# EAGLE board Proppeler Clock Print (EAGLE 9.5.0)
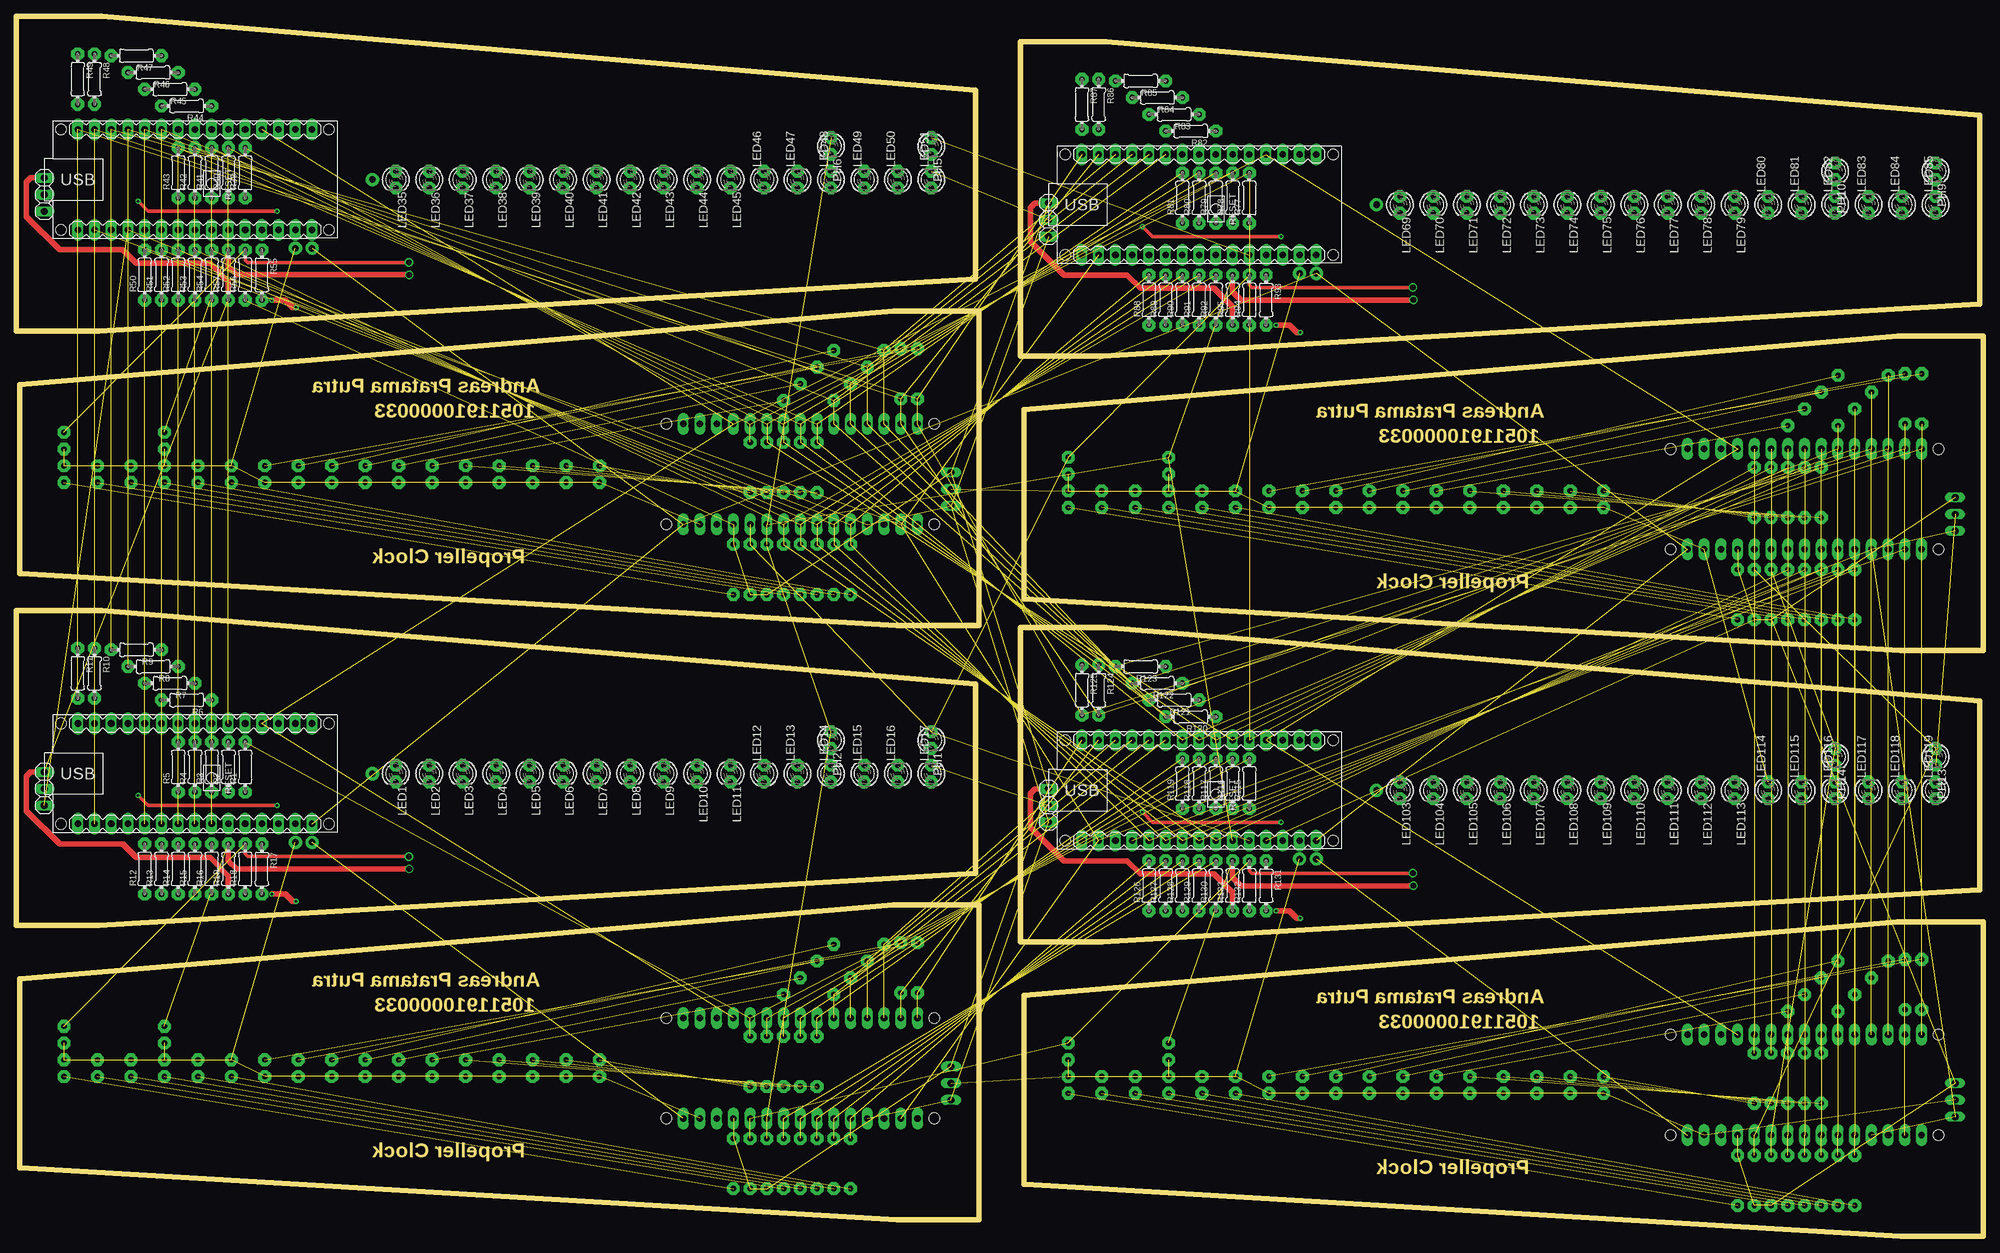
[diagram p0: board, top side]
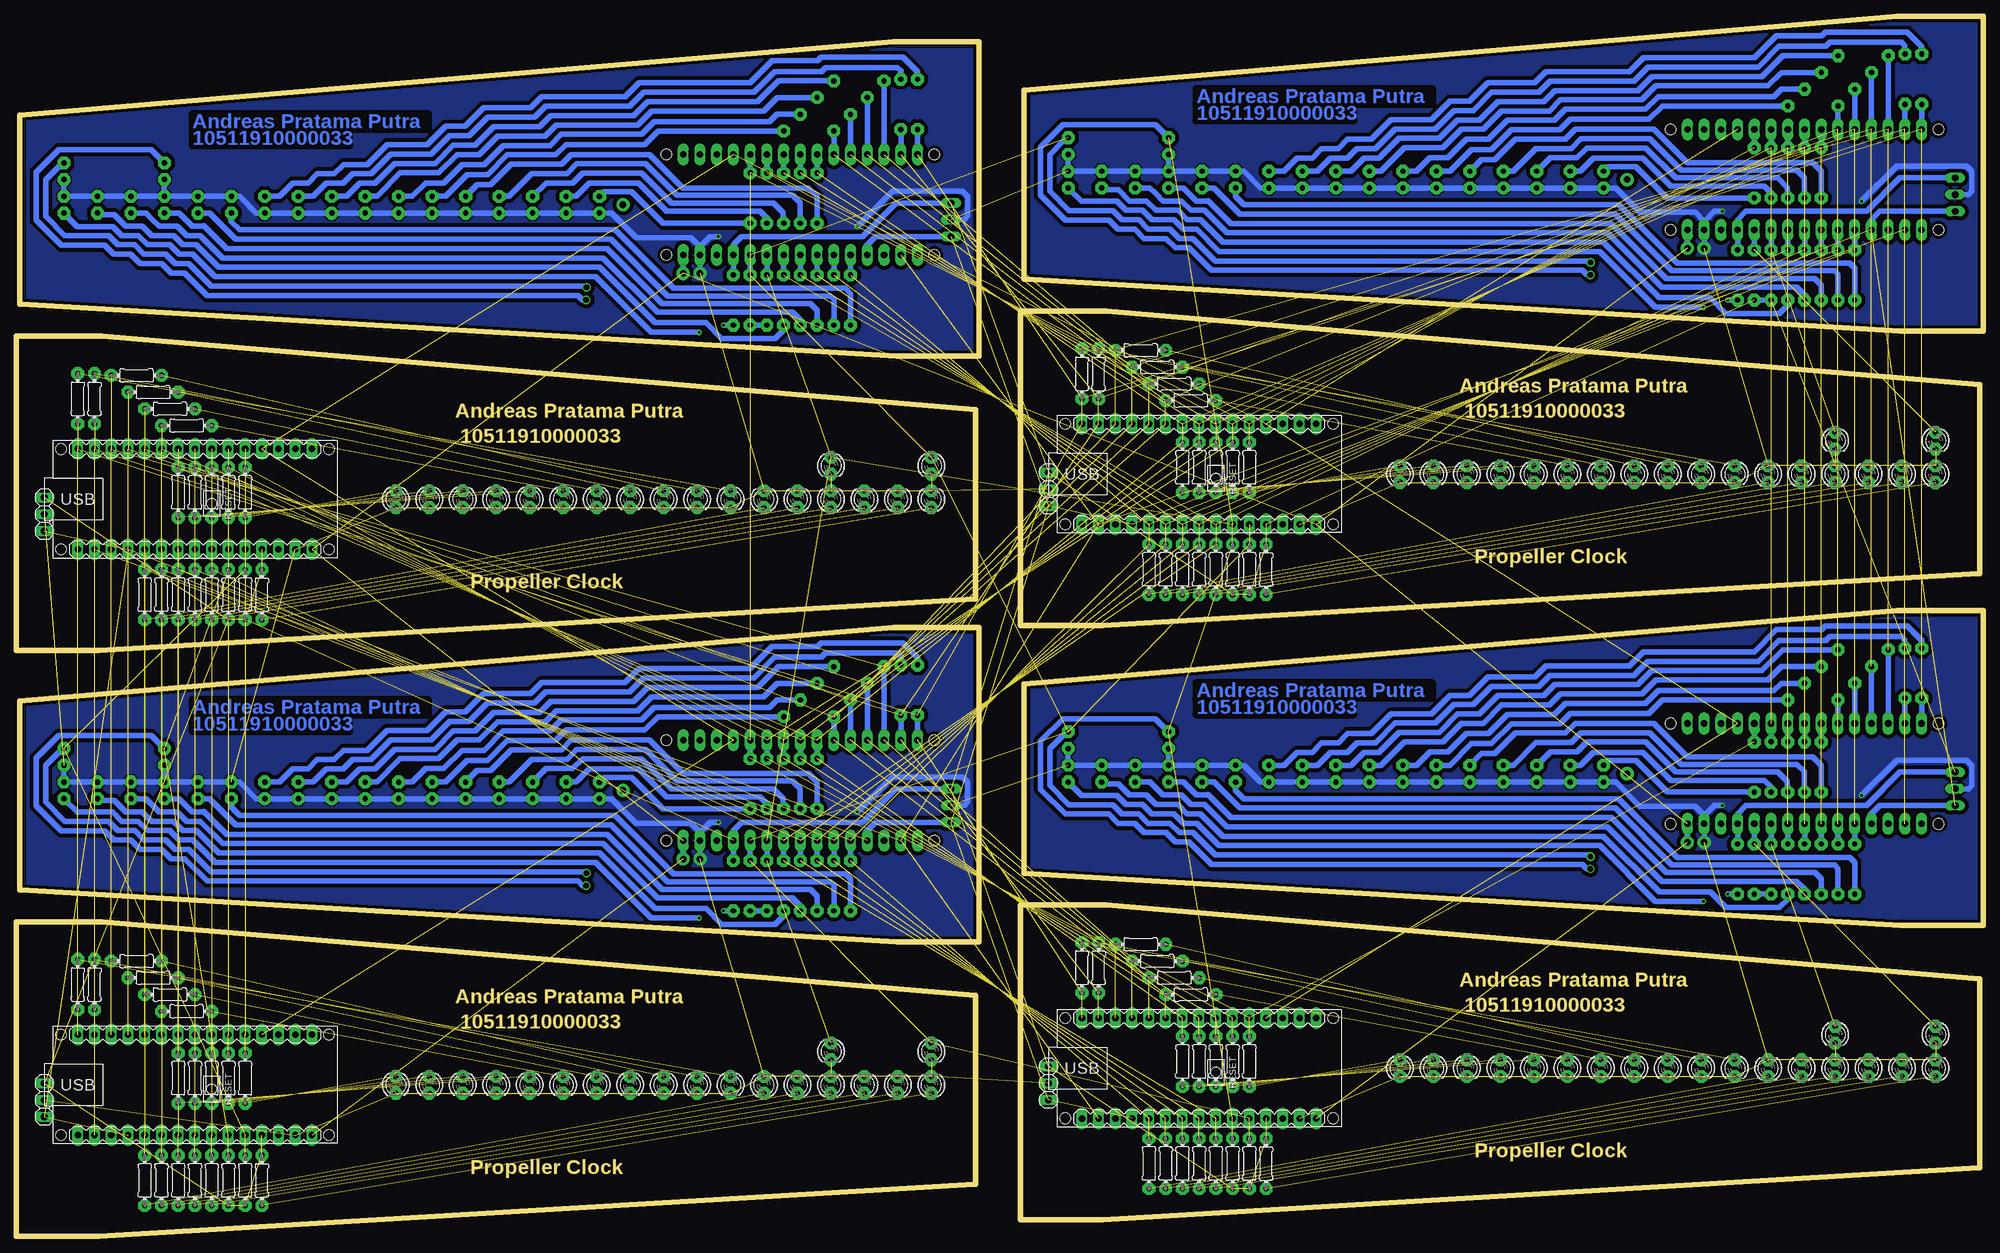
[diagram p1: board, bottom side, seen from below]

Size 298.45 x 185.17 mm. Coordinates in mm from the lower left corner, seen from the top.
Outline: 145.41,55.12 12.45,47.24 0,47.24 0,95 12.95,95 145.54,83.82
Outline: 145.54,55.12 145.54,83.82
Outline: 145.54,83.82 145.29,83.82
Outline: 0.64,10.41 133.6,2.54 146.05,2.54 146.05,50.29 133.1,50.29 0.51,39.12
Outline: 0.51,10.41 0.51,39.12
Outline: 0.51,39.12 0.76,39.12
Outline: 145.41,145.29 12.45,137.41 0,137.41 0,185.17 12.95,185.17 145.54,173.99
Outline: 145.54,145.29 145.54,173.99
Outline: 145.54,173.99 145.29,173.99
Outline: 0.64,100.58 133.6,92.71 146.05,92.71 146.05,140.46 133.1,140.46 0.51,129.29
Outline: 0.51,100.58 0.51,129.29
Outline: 0.51,129.29 0.76,129.29
Outline: 297.81,141.48 164.85,133.6 152.4,133.6 152.4,181.36 165.35,181.36 297.94,170.18
Outline: 297.94,141.48 297.94,170.18
Outline: 297.94,170.18 297.69,170.18
Outline: 153.03,96.77 286,88.9 298.45,88.9 298.45,136.65 285.5,136.65 152.91,125.48
Outline: 152.91,96.77 152.91,125.48
Outline: 152.91,125.48 153.16,125.48
Outline: 297.81,52.58 164.85,44.7 152.4,44.7 152.4,92.46 165.35,92.46 297.94,81.28
Outline: 297.94,52.58 297.94,81.28
Outline: 297.94,81.28 297.69,81.28
Outline: 153.03,7.87 286,0 298.45,0 298.45,47.75 285.5,47.75 152.91,36.58
Outline: 152.91,7.87 152.91,36.58
Outline: 152.91,36.58 153.16,36.58
Copper layers (1*16): Top 0.035mm / dielectric 1.5mm / Bottom 0.035mm
Design rules "default *": minimum track width 6mil, minimum drill 0.35mm, track to track 24mil, track to pad 24mil, pad to pad 24mil, via to via 24mil, smd to smd 24mil, copper to edge 20mil, drill to drill 6mil, minimum pad ring 10mil, minimum via ring 8mil, stop-mask expansion 4mil, vias tented up to drill 0mil, thermal gap 10mil

## Footprints (pad centres in the part's own frame; a part is rotated, then mirrored left to right if it is on the bottom)
1X03 = drill 1.016 long: 1 -2.54,0; 2 0,0; 3 2.54,0
LED3MM = drill 0.813 pad 1.93 octagon: A -1.27,0; K 1.27,0
ARDUINO-NANO-3.0 = drill 1 pad 1.676 long: J1.1 17.78,7.62; J1.2 15.24,7.62; J1.3 12.7,7.62; J1.4 10.16,7.62; J1.5 7.62,7.62; J1.6 5.08,7.62; J1.7 2.54,7.62; J1.8 0,7.62; J1.9 -2.54,7.62; J1.10 -5.08,7.62; J1.11 -7.62,7.62; J1.12 -10.16,7.62; J1.13 -12.7,7.62; J1.14 -15.24,7.62; J1.15 -17.78,7.62; J2.1 17.78,-7.62; J2.2 15.24,-7.62; J2.3 12.7,-7.62; J2.4 10.16,-7.62; J2.5 7.62,-7.62; J2.6 5.08,-7.62; J2.7 2.54,-7.62; J2.8 0,-7.62; J2.9 -2.54,-7.62; J2.10 -5.08,-7.62; J2.11 -7.62,-7.62; J2.12 -10.16,-7.62; J2.13 -12.7,-7.62; J2.14 -15.24,-7.62; J2.15 -17.78,-7.62 | hole 1.651: -20.32,7.62; -20.32,-7.62; 20.32,-7.62; 20.32,7.62
0204/7 = drill 0.813 pad 1.93 octagon: 1 -3.81,0; 2 3.81,0

## Placement (x,y rotation side)
JP1  [1X03]  4.22,67.95 270 top
JP2  [1X03]  141.83,23.25 270 bottom
JP3  [1X03]  4.22,158.12 270 top
JP4  [1X03]  141.83,113.42 270 bottom
JP5  [1X03]  156.62,154.31 270 top
JP6  [1X03]  294.23,109.61 270 bottom
JP7  [1X03]  156.62,65.41 270 top
JP8  [1X03]  294.23,20.71 270 bottom
LED1  [LED3MM]  57.56,70.24 270 top
LED2  [LED3MM]  62.64,70.24 270 top
LED3  [LED3MM]  67.72,70.24 270 top
LED4  [LED3MM]  72.8,70.24 270 top
LED5  [LED3MM]  77.88,70.24 270 top
LED6  [LED3MM]  82.96,70.24 270 top
LED7  [LED3MM]  88.04,70.24 270 top
LED8  [LED3MM]  93.12,70.24 270 top
LED9  [LED3MM]  98.2,70.24 270 top
LED10  [LED3MM]  103.28,70.24 270 top
LED11  [LED3MM]  108.36,70.24 270 top
LED12  [LED3MM]  113.44,70.24 90 top
LED13  [LED3MM]  118.52,70.24 90 top
LED14  [LED3MM]  123.6,70.24 90 top
LED15  [LED3MM]  128.68,70.24 90 top
LED16  [LED3MM]  133.76,70.24 90 top
LED17  [LED3MM]  138.84,70.24 90 top
LED18  [LED3MM]  88.49,25.53 270 bottom
LED19  [LED3MM]  83.41,25.53 270 bottom
LED20  [LED3MM]  78.33,25.53 270 bottom
LED21  [LED3MM]  73.25,25.53 270 bottom
LED22  [LED3MM]  68.17,25.53 270 bottom
LED23  [LED3MM]  63.09,25.53 270 bottom
LED24  [LED3MM]  58.01,25.53 270 bottom
LED25  [LED3MM]  52.93,25.53 270 bottom
LED26  [LED3MM]  47.85,25.53 270 bottom
LED27  [LED3MM]  42.77,25.53 270 bottom
LED28  [LED3MM]  37.69,25.53 270 bottom
LED29  [LED3MM]  32.61,25.53 90 bottom
LED30  [LED3MM]  27.53,25.53 90 bottom
LED31  [LED3MM]  22.45,25.53 90 bottom
LED32  [LED3MM]  17.37,25.53 90 bottom
LED33  [LED3MM]  12.29,25.53 90 bottom
LED34  [LED3MM]  7.21,25.53 90 bottom
LED35  [LED3MM]  57.56,160.41 270 top
LED36  [LED3MM]  62.64,160.41 270 top
LED37  [LED3MM]  67.72,160.41 270 top
LED38  [LED3MM]  72.8,160.41 270 top
LED39  [LED3MM]  77.88,160.41 270 top
LED40  [LED3MM]  82.96,160.41 270 top
LED41  [LED3MM]  88.04,160.41 270 top
LED42  [LED3MM]  93.12,160.41 270 top
LED43  [LED3MM]  98.2,160.41 270 top
LED44  [LED3MM]  103.28,160.41 270 top
LED45  [LED3MM]  108.36,160.41 270 top
LED46  [LED3MM]  113.44,160.41 90 top
LED47  [LED3MM]  118.52,160.41 90 top
LED48  [LED3MM]  123.6,160.41 90 top
LED49  [LED3MM]  128.68,160.41 90 top
LED50  [LED3MM]  133.76,160.41 90 top
LED51  [LED3MM]  138.84,160.41 90 top
LED52  [LED3MM]  88.49,115.7 270 bottom
LED53  [LED3MM]  83.41,115.7 270 bottom
LED54  [LED3MM]  78.33,115.7 270 bottom
LED55  [LED3MM]  73.25,115.7 270 bottom
LED56  [LED3MM]  68.17,115.7 270 bottom
LED57  [LED3MM]  63.09,115.7 270 bottom
LED58  [LED3MM]  58.01,115.7 270 bottom
LED59  [LED3MM]  52.93,115.7 270 bottom
LED60  [LED3MM]  47.85,115.7 270 bottom
LED61  [LED3MM]  42.77,115.7 270 bottom
LED62  [LED3MM]  37.69,115.7 270 bottom
LED63  [LED3MM]  32.61,115.7 90 bottom
LED64  [LED3MM]  27.53,115.7 90 bottom
LED65  [LED3MM]  22.45,115.7 90 bottom
LED66  [LED3MM]  17.37,115.7 90 bottom
LED67  [LED3MM]  12.29,115.7 90 bottom
LED68  [LED3MM]  7.21,115.7 90 bottom
LED69  [LED3MM]  209.96,156.6 270 top
LED70  [LED3MM]  215.04,156.6 270 top
LED71  [LED3MM]  220.12,156.6 270 top
LED72  [LED3MM]  225.2,156.6 270 top
LED73  [LED3MM]  230.28,156.6 270 top
LED74  [LED3MM]  235.36,156.6 270 top
LED75  [LED3MM]  240.44,156.6 270 top
LED76  [LED3MM]  245.52,156.6 270 top
LED77  [LED3MM]  250.6,156.6 270 top
LED78  [LED3MM]  255.68,156.6 270 top
LED79  [LED3MM]  260.76,156.6 270 top
LED80  [LED3MM]  265.84,156.6 90 top
LED81  [LED3MM]  270.92,156.6 90 top
LED82  [LED3MM]  276,156.6 90 top
LED83  [LED3MM]  281.08,156.6 90 top
LED84  [LED3MM]  286.16,156.6 90 top
LED85  [LED3MM]  291.24,156.6 90 top
LED86  [LED3MM]  240.89,111.89 270 bottom
LED87  [LED3MM]  235.81,111.89 270 bottom
LED88  [LED3MM]  230.73,111.89 270 bottom
LED89  [LED3MM]  225.65,111.89 270 bottom
LED90  [LED3MM]  220.57,111.89 270 bottom
LED91  [LED3MM]  215.49,111.89 270 bottom
LED92  [LED3MM]  210.41,111.89 270 bottom
LED93  [LED3MM]  205.33,111.89 270 bottom
LED94  [LED3MM]  200.25,111.89 270 bottom
LED95  [LED3MM]  195.17,111.89 270 bottom
LED96  [LED3MM]  190.09,111.89 270 bottom
LED97  [LED3MM]  185.01,111.89 90 bottom
LED98  [LED3MM]  179.93,111.89 90 bottom
LED99  [LED3MM]  174.85,111.89 90 bottom
LED100  [LED3MM]  169.77,111.89 90 bottom
LED101  [LED3MM]  164.69,111.89 90 bottom
LED102  [LED3MM]  159.61,111.89 90 bottom
LED103  [LED3MM]  209.96,67.7 270 top
LED104  [LED3MM]  215.04,67.7 270 top
LED105  [LED3MM]  220.12,67.7 270 top
LED106  [LED3MM]  225.2,67.7 270 top
LED107  [LED3MM]  230.28,67.7 270 top
LED108  [LED3MM]  235.36,67.7 270 top
LED109  [LED3MM]  240.44,67.7 270 top
LED110  [LED3MM]  245.52,67.7 270 top
LED111  [LED3MM]  250.6,67.7 270 top
LED112  [LED3MM]  255.68,67.7 270 top
LED113  [LED3MM]  260.76,67.7 270 top
LED114  [LED3MM]  265.84,67.7 90 top
LED115  [LED3MM]  270.92,67.7 90 top
LED116  [LED3MM]  276,67.7 90 top
LED117  [LED3MM]  281.08,67.7 90 top
LED118  [LED3MM]  286.16,67.7 90 top
LED119  [LED3MM]  291.24,67.7 90 top
LED120  [LED3MM]  240.89,22.99 270 bottom
LED121  [LED3MM]  235.81,22.99 270 bottom
LED122  [LED3MM]  230.73,22.99 270 bottom
LED123  [LED3MM]  225.65,22.99 270 bottom
LED124  [LED3MM]  220.57,22.99 270 bottom
LED125  [LED3MM]  215.49,22.99 270 bottom
LED126  [LED3MM]  210.41,22.99 270 bottom
LED127  [LED3MM]  205.33,22.99 270 bottom
LED128  [LED3MM]  200.25,22.99 270 bottom
LED129  [LED3MM]  195.17,22.99 270 bottom
LED130  [LED3MM]  190.09,22.99 270 bottom
LED131  [LED3MM]  185.01,22.99 90 bottom
LED132  [LED3MM]  179.93,22.99 90 bottom
LED133  [LED3MM]  174.85,22.99 90 bottom
LED134  [LED3MM]  169.77,22.99 90 bottom
LED135  [LED3MM]  164.69,22.99 90 bottom
LED136  [LED3MM]  159.61,22.99 90 bottom
M1  ARDUINO-NANO-3.0  [ARDUINO-NANO-3.0]  27.08,70.24 0 top
M2  ARDUINO-NANO-3.0  [ARDUINO-NANO-3.0]  118.97,25.53 0 bottom
M3  ARDUINO-NANO-3.0  [ARDUINO-NANO-3.0]  27.08,160.41 0 top
M4  ARDUINO-NANO-3.0  [ARDUINO-NANO-3.0]  118.97,115.7 0 bottom
M5  ARDUINO-NANO-3.0  [ARDUINO-NANO-3.0]  179.48,156.6 0 top
M6  ARDUINO-NANO-3.0  [ARDUINO-NANO-3.0]  271.37,111.89 0 bottom
M7  ARDUINO-NANO-3.0  [ARDUINO-NANO-3.0]  179.48,67.7 0 top
M8  ARDUINO-NANO-3.0  [ARDUINO-NANO-3.0]  271.37,22.99 0 bottom
PH1  [LED3MM]  138.84,75.32 270 top
PH2  [LED3MM]  123.6,75.32 270 top
PH3  [LED3MM]  7.21,30.61 270 bottom
PH4  [LED3MM]  22.45,30.61 270 bottom
PH5  [LED3MM]  138.84,165.49 270 top
PH6  [LED3MM]  123.6,165.49 270 top
PH7  [LED3MM]  7.21,120.78 270 bottom
PH8  [LED3MM]  22.45,120.78 270 bottom
PH9  [LED3MM]  291.24,161.68 270 top
PH10  [LED3MM]  276,161.68 270 top
PH11  [LED3MM]  159.61,116.97 270 bottom
PH12  [LED3MM]  174.85,116.97 270 bottom
PH13  [LED3MM]  291.24,72.78 270 top
PH14  [LED3MM]  276,72.78 270 top
PH15  [LED3MM]  159.61,28.07 270 bottom
PH16  [LED3MM]  174.85,28.07 270 bottom
R1  330  [0204/7]  34.7,71.25 90 top
R2  [0204/7]  32.16,71.25 90 top
R3  [0204/7]  29.62,71.25 90 top
R4  [0204/7]  27.08,71.25 90 top
R5  [0204/7]  24.54,71.25 90 top
R6  [0204/7]  25.81,81.41 180 top
R7  [0204/7]  23.27,83.95 180 top
R8  [0204/7]  20.73,86.49 180 top
R9  [0204/7]  18.19,89.03 180 top
R10  [0204/7]  11.84,85.48 270 top
R11  [0204/7]  9.3,85.48 270 top
R12  [0204/7]  19.46,55.76 90 top
R13  [0204/7]  22,55.76 90 top
R14  [0204/7]  24.54,55.76 90 top
R15  [0204/7]  27.08,55.76 90 top
R16  [0204/7]  29.62,55.76 90 top
R17  2k2  [0204/7]  37.24,55.76 270 top
R18  10k  [0204/7]  34.7,55.76 90 top
R19  10k  [0204/7]  32.16,55.76 90 top
R20  330  [0204/7]  111.35,26.55 90 bottom
R21  [0204/7]  113.89,26.55 90 bottom
R22  [0204/7]  116.43,26.55 90 bottom
R23  [0204/7]  118.97,26.55 90 bottom
R24  [0204/7]  121.51,26.55 90 bottom
R25  [0204/7]  120.24,36.71 180 bottom
R26  [0204/7]  122.78,39.25 180 bottom
R27  [0204/7]  125.32,41.79 180 bottom
R28  [0204/7]  127.86,44.33 180 bottom
R29  [0204/7]  134.21,40.77 270 bottom
R30  [0204/7]  136.75,40.77 270 bottom
R31  [0204/7]  126.59,11.05 90 bottom
R32  [0204/7]  124.05,11.05 90 bottom
R33  [0204/7]  121.51,11.05 90 bottom
R34  [0204/7]  118.97,11.05 90 bottom
R35  [0204/7]  116.43,11.05 90 bottom
R36  2k2  [0204/7]  108.81,11.05 270 bottom
R37  10k  [0204/7]  111.35,11.05 90 bottom
R38  10k  [0204/7]  113.89,11.05 90 bottom
R39  330  [0204/7]  34.7,161.42 90 top
R40  [0204/7]  32.16,161.42 90 top
R41  [0204/7]  29.62,161.42 90 top
R42  [0204/7]  27.08,161.42 90 top
R43  [0204/7]  24.54,161.42 90 top
R44  [0204/7]  25.81,171.58 180 top
R45  [0204/7]  23.27,174.12 180 top
R46  [0204/7]  20.73,176.66 180 top
R47  [0204/7]  18.19,179.2 180 top
R48  [0204/7]  11.84,175.65 270 top
R49  [0204/7]  9.3,175.65 270 top
R50  [0204/7]  19.46,145.93 90 top
R51  [0204/7]  22,145.93 90 top
R52  [0204/7]  24.54,145.93 90 top
R53  [0204/7]  27.08,145.93 90 top
R54  [0204/7]  29.62,145.93 90 top
R55  2k2  [0204/7]  37.24,145.93 270 top
R56  10k  [0204/7]  34.7,145.93 90 top
R57  10k  [0204/7]  32.16,145.93 90 top
R58  330  [0204/7]  111.35,116.72 90 bottom
R59  [0204/7]  113.89,116.72 90 bottom
R60  [0204/7]  116.43,116.72 90 bottom
R61  [0204/7]  118.97,116.72 90 bottom
R62  [0204/7]  121.51,116.72 90 bottom
R63  [0204/7]  120.24,126.88 180 bottom
R64  [0204/7]  122.78,129.42 180 bottom
R65  [0204/7]  125.32,131.96 180 bottom
R66  [0204/7]  127.86,134.5 180 bottom
R67  [0204/7]  134.21,130.94 270 bottom
R68  [0204/7]  136.75,130.94 270 bottom
R69  [0204/7]  126.59,101.22 90 bottom
R70  [0204/7]  124.05,101.22 90 bottom
R71  [0204/7]  121.51,101.22 90 bottom
R72  [0204/7]  118.97,101.22 90 bottom
R73  [0204/7]  116.43,101.22 90 bottom
R74  2k2  [0204/7]  108.81,101.22 270 bottom
R75  10k  [0204/7]  111.35,101.22 90 bottom
R76  10k  [0204/7]  113.89,101.22 90 bottom
R77  330  [0204/7]  187.1,157.61 90 top
R78  [0204/7]  184.56,157.61 90 top
R79  [0204/7]  182.02,157.61 90 top
R80  [0204/7]  179.48,157.61 90 top
R81  [0204/7]  176.94,157.61 90 top
R82  [0204/7]  178.21,167.77 180 top
R83  [0204/7]  175.67,170.31 180 top
R84  [0204/7]  173.13,172.85 180 top
R85  [0204/7]  170.59,175.39 180 top
R86  [0204/7]  164.24,171.84 270 top
R87  [0204/7]  161.7,171.84 270 top
R88  [0204/7]  171.86,142.12 90 top
R89  [0204/7]  174.4,142.12 90 top
R90  [0204/7]  176.94,142.12 90 top
R91  [0204/7]  179.48,142.12 90 top
R92  [0204/7]  182.02,142.12 90 top
R93  2k2  [0204/7]  189.64,142.12 270 top
R94  10k  [0204/7]  187.1,142.12 90 top
R95  10k  [0204/7]  184.56,142.12 90 top
R96  330  [0204/7]  263.75,112.91 90 bottom
R97  [0204/7]  266.29,112.91 90 bottom
R98  [0204/7]  268.83,112.91 90 bottom
R99  [0204/7]  271.37,112.91 90 bottom
R100  [0204/7]  273.91,112.91 90 bottom
R101  [0204/7]  272.64,123.07 180 bottom
R102  [0204/7]  275.18,125.61 180 bottom
R103  [0204/7]  277.72,128.15 180 bottom
R104  [0204/7]  280.26,130.69 180 bottom
R105  [0204/7]  286.61,127.13 270 bottom
R106  [0204/7]  289.15,127.13 270 bottom
R107  [0204/7]  278.99,97.41 90 bottom
R108  [0204/7]  276.45,97.41 90 bottom
R109  [0204/7]  273.91,97.41 90 bottom
R110  [0204/7]  271.37,97.41 90 bottom
R111  [0204/7]  268.83,97.41 90 bottom
R112  2k2  [0204/7]  261.21,97.41 270 bottom
R113  10k  [0204/7]  263.75,97.41 90 bottom
R114  10k  [0204/7]  266.29,97.41 90 bottom
R115  330  [0204/7]  187.1,68.71 90 top
R116  [0204/7]  184.56,68.71 90 top
R117  [0204/7]  182.02,68.71 90 top
R118  [0204/7]  179.48,68.71 90 top
R119  [0204/7]  176.94,68.71 90 top
R120  [0204/7]  178.21,78.87 180 top
R121  [0204/7]  175.67,81.41 180 top
R122  [0204/7]  173.13,83.95 180 top
R123  [0204/7]  170.59,86.49 180 top
R124  [0204/7]  164.24,82.94 270 top
R125  [0204/7]  161.7,82.94 270 top
R126  [0204/7]  171.86,53.22 90 top
R127  [0204/7]  174.4,53.22 90 top
R128  [0204/7]  176.94,53.22 90 top
R129  [0204/7]  179.48,53.22 90 top
R130  [0204/7]  182.02,53.22 90 top
R131  2k2  [0204/7]  189.64,53.22 270 top
R132  10k  [0204/7]  187.1,53.22 90 top
R133  10k  [0204/7]  184.56,53.22 90 top
R134  330  [0204/7]  263.75,24.01 90 bottom
R135  [0204/7]  266.29,24.01 90 bottom
R136  [0204/7]  268.83,24.01 90 bottom
R137  [0204/7]  271.37,24.01 90 bottom
R138  [0204/7]  273.91,24.01 90 bottom
R139  [0204/7]  272.64,34.17 180 bottom
R140  [0204/7]  275.18,36.71 180 bottom
R141  [0204/7]  277.72,39.25 180 bottom
R142  [0204/7]  280.26,41.79 180 bottom
R143  [0204/7]  286.61,38.23 270 bottom
R144  [0204/7]  289.15,38.23 270 bottom
R145  [0204/7]  278.99,8.51 90 bottom
R146  [0204/7]  276.45,8.51 90 bottom
R147  [0204/7]  273.91,8.51 90 bottom
R148  [0204/7]  271.37,8.51 90 bottom
R149  [0204/7]  268.83,8.51 90 bottom
R150  2k2  [0204/7]  261.21,8.51 270 bottom
R151  10k  [0204/7]  263.75,8.51 90 bottom
R152  10k  [0204/7]  266.29,8.51 90 bottom

## Library data of the parts
JP1-JP8 = pinhead
LED1-LED136 PH1-PH16 = led
M1-M8 = diy-modules
R1-R152 = rcl; SPICEPREFIX: R

## Nets
2: M1.J1.5 M2.J1.5 M3.J1.5 M4.J1.5 M5.J1.5 M6.J1.5 M7.J1.5 M8.J1.5 R1.2 R20.2 R39.2 R58.2 R77.2 R96.2 R115.2 R134.2
3: M1.J1.6 M2.J1.6 M3.J1.6 M4.J1.6 M5.J1.6 M6.J1.6 M7.J1.6 M8.J1.6 R2.2 R21.2 R40.2 R59.2 R78.2 R97.2 R116.2 R135.2
3V3: M1.J2.14 M2.J2.14 M3.J2.14 M4.J2.14 M5.J2.14 M6.J2.14 M7.J2.14 M8.J2.14
4: M1.J1.7 M2.J1.7 M3.J1.7 M4.J1.7 M5.J1.7 M6.J1.7 M7.J1.7 M8.J1.7 R3.2 R22.2 R41.2 R60.2 R79.2 R98.2 R117.2 R136.2
5: M1.J1.8 M2.J1.8 M3.J1.8 M4.J1.8 M5.J1.8 M6.J1.8 M7.J1.8 M8.J1.8 R4.2 R23.2 R42.2 R61.2 R80.2 R99.2 R118.2 R137.2
5V: JP1.1 JP2.1 JP3.1 JP4.1 JP5.1 JP6.1 JP7.1 JP8.1 M1.J2.4 M2.J2.4 M3.J2.4 M4.J2.4 M5.J2.4 M6.J2.4 M7.J2.4 M8.J2.4 R17.1 R18.1 R19.1 R36.1 R37.1 R38.1 R55.1 R56.1 R57.1 R74.1 R75.1 R76.1 R93.1 R94.1 R95.1 R112.1 R113.1 R114.1 R131.1 R132.1 R133.1 R150.1 R151.1 R152.1
6: M1.J1.9 M2.J1.9 M3.J1.9 M4.J1.9 M5.J1.9 M6.J1.9 M7.J1.9 M8.J1.9 R5.2 R24.2 R43.2 R62.2 R81.2 R100.2 R119.2 R138.2
7: M1.J1.10 M2.J1.10 M3.J1.10 M4.J1.10 M5.J1.10 M6.J1.10 M7.J1.10 M8.J1.10 R6.2 R25.2 R44.2 R63.2 R82.2 R101.2 R120.2 R139.2
8: M1.J1.11 M2.J1.11 M3.J1.11 M4.J1.11 M5.J1.11 M6.J1.11 M7.J1.11 M8.J1.11 R7.2 R26.2 R45.2 R64.2 R83.2 R102.2 R121.2 R140.2
9: M1.J1.12 M2.J1.12 M3.J1.12 M4.J1.12 M5.J1.12 M6.J1.12 M7.J1.12 M8.J1.12 R8.2 R27.2 R46.2 R65.2 R84.2 R103.2 R122.2 R141.2
10: M1.J1.13 M2.J1.13 M3.J1.13 M4.J1.13 M5.J1.13 M6.J1.13 M7.J1.13 M8.J1.13 R9.2 R28.2 R47.2 R66.2 R85.2 R104.2 R123.2 R142.2
11: M1.J1.14 M2.J1.14 M3.J1.14 M4.J1.14 M5.J1.14 M6.J1.14 M7.J1.14 M8.J1.14 R10.2 R29.2 R48.2 R67.2 R86.2 R105.2 R124.2 R143.2
12: M1.J1.15 M2.J1.15 M3.J1.15 M4.J1.15 M5.J1.15 M6.J1.15 M7.J1.15 M8.J1.15 R11.2 R30.2 R49.2 R68.2 R87.2 R106.2 R125.2 R144.2
A0: JP1.3 JP2.3 JP3.3 JP4.3 JP5.3 JP6.3 JP7.3 JP8.3 M1.J2.12 M2.J2.12 M3.J2.12 M4.J2.12 M5.J2.12 M6.J2.12 M7.J2.12 M8.J2.12
A1: M1.J2.11 M2.J2.11 M3.J2.11 M4.J2.11 M5.J2.11 M6.J2.11 M7.J2.11 M8.J2.11 R12.2 R31.2 R50.2 R69.2 R88.2 R107.2 R126.2 R145.2
A2: M1.J2.10 M2.J2.10 M3.J2.10 M4.J2.10 M5.J2.10 M6.J2.10 M7.J2.10 M8.J2.10 R13.2 R32.2 R51.2 R70.2 R89.2 R108.2 R127.2 R146.2
A3: M1.J2.9 M2.J2.9 M3.J2.9 M4.J2.9 M5.J2.9 M6.J2.9 M7.J2.9 M8.J2.9 R14.2 R33.2 R52.2 R71.2 R90.2 R109.2 R128.2 R147.2
A4: M1.J2.8 M2.J2.8 M3.J2.8 M4.J2.8 M5.J2.8 M6.J2.8 M7.J2.8 M8.J2.8 R15.2 R34.2 R53.2 R72.2 R91.2 R110.2 R129.2 R148.2
A5: M1.J2.7 M2.J2.7 M3.J2.7 M4.J2.7 M5.J2.7 M6.J2.7 M7.J2.7 M8.J2.7 R16.2 R35.2 R54.2 R73.2 R92.2 R111.2 R130.2 R149.2
A6: M1.J2.6 M2.J2.6 M3.J2.6 M4.J2.6 M5.J2.6 M6.J2.6 M7.J2.6 M8.J2.6 PH2.A PH4.A PH6.A PH8.A PH10.A PH12.A PH14.A PH16.A R19.2 R38.2 R57.2 R76.2 R95.2 R114.2 R133.2 R152.2
A7: M1.J2.5 M2.J2.5 M3.J2.5 M4.J2.5 M5.J2.5 M6.J2.5 M7.J2.5 M8.J2.5 PH1.A PH3.A PH5.A PH7.A PH9.A PH11.A PH13.A PH15.A R18.2 R37.2 R56.2 R75.2 R94.2 R113.2 R132.2 R151.2
GND: JP1.2 JP2.2 JP3.2 JP4.2 JP5.2 JP6.2 JP7.2 JP8.2 LED1.K LED2.K LED3.K LED4.K LED5.K LED6.K LED7.K LED8.K LED9.K LED10.K LED11.K LED12.K LED13.K LED14.K LED15.K LED16.K LED17.K LED18.K LED19.K LED20.K LED21.K LED22.K LED23.K LED24.K LED25.K LED26.K LED27.K LED28.K LED29.K LED30.K LED31.K LED32.K LED33.K LED34.K LED35.K LED36.K LED37.K LED38.K LED39.K LED40.K LED41.K LED42.K LED43.K LED44.K LED45.K LED46.K LED47.K LED48.K LED49.K LED50.K LED51.K LED52.K LED53.K LED54.K LED55.K LED56.K LED57.K LED58.K LED59.K LED60.K LED61.K LED62.K LED63.K LED64.K LED65.K LED66.K LED67.K LED68.K LED69.K LED70.K LED71.K LED72.K LED73.K LED74.K LED75.K LED76.K LED77.K LED78.K LED79.K LED80.K LED81.K LED82.K LED83.K LED84.K LED85.K LED86.K LED87.K LED88.K LED89.K LED90.K LED91.K LED92.K LED93.K LED94.K LED95.K LED96.K LED97.K LED98.K LED99.K LED100.K LED101.K LED102.K LED103.K LED104.K LED105.K LED106.K LED107.K LED108.K LED109.K LED110.K LED111.K LED112.K LED113.K LED114.K LED115.K LED116.K LED117.K LED118.K LED119.K LED120.K LED121.K LED122.K LED123.K LED124.K LED125.K LED126.K LED127.K LED128.K LED129.K LED130.K LED131.K LED132.K LED133.K LED134.K LED135.K LED136.K M1.J2.2 M2.J2.2 M3.J2.2 M4.J2.2 M5.J2.2 M6.J2.2 M7.J2.2 M8.J2.2 PH1.K PH2.K PH3.K PH4.K PH5.K PH6.K PH7.K PH8.K PH9.K PH10.K PH11.K PH12.K PH13.K PH14.K PH15.K PH16.K
GND.1: M1.J1.4 M2.J1.4 M3.J1.4 M4.J1.4 M5.J1.4 M6.J1.4 M7.J1.4 M8.J1.4
N$1: LED1.A R1.1
N$2: LED2.A R2.1
N$3: LED3.A R3.1
N$4: LED4.A R4.1
N$5: LED5.A R5.1
N$6: LED6.A R6.1
N$7: LED7.A R7.1
N$8: LED8.A R8.1
N$9: LED9.A R9.1
N$10: LED10.A R10.1
N$11: LED11.A R11.1
N$12: LED12.A R12.1
N$13: LED13.A R13.1
N$14: LED14.A R14.1
N$15: LED15.A R15.1
N$16: LED16.A R16.1
N$18: LED18.A R20.1
N$19: LED19.A R21.1
N$20: LED17.A R17.2
N$21: LED20.A R22.1
N$22: LED21.A R23.1
N$23: LED22.A R24.1
N$24: LED23.A R25.1
N$25: LED24.A R26.1
N$26: LED25.A R27.1
N$27: LED26.A R28.1
N$28: LED27.A R29.1
N$29: LED28.A R30.1
N$30: LED29.A R31.1
N$31: LED30.A R32.1
N$32: LED31.A R33.1
N$33: LED32.A R34.1
N$34: LED33.A R35.1
N$35: LED34.A R36.2
N$36: LED35.A R39.1
N$37: LED36.A R40.1
N$38: LED37.A R41.1
N$39: LED38.A R42.1
N$40: LED39.A R43.1
N$41: LED40.A R44.1
N$42: LED41.A R45.1
N$43: LED42.A R46.1
N$44: LED43.A R47.1
N$45: LED44.A R48.1
N$46: LED45.A R49.1
N$47: LED46.A R50.1
N$48: LED47.A R51.1
N$49: LED48.A R52.1
N$50: LED49.A R53.1
N$51: LED50.A R54.1
N$52: LED51.A R55.2
N$53: LED52.A R58.1
N$54: LED53.A R59.1
N$55: LED54.A R60.1
N$56: LED55.A R61.1
N$57: LED56.A R62.1
N$58: LED57.A R63.1
N$59: LED58.A R64.1
N$60: LED59.A R65.1
N$61: LED60.A R66.1
N$62: LED61.A R67.1
N$63: LED62.A R68.1
N$64: LED63.A R69.1
N$65: LED64.A R70.1
N$66: LED65.A R71.1
N$67: LED66.A R72.1
N$68: LED67.A R73.1
N$69: LED68.A R74.2
N$71: LED69.A R77.1
N$72: LED70.A R78.1
N$73: LED71.A R79.1
N$74: LED72.A R80.1
N$75: LED73.A R81.1
N$76: LED74.A R82.1
N$77: LED75.A R83.1
N$78: LED76.A R84.1
N$79: LED77.A R85.1
N$80: LED78.A R86.1
N$81: LED79.A R87.1
N$82: LED80.A R88.1
N$83: LED81.A R89.1
N$84: LED82.A R90.1
N$85: LED83.A R91.1
N$86: LED84.A R92.1
N$87: LED85.A R93.2
N$88: LED86.A R96.1
N$89: LED87.A R97.1
N$90: LED88.A R98.1
N$91: LED89.A R99.1
N$92: LED90.A R100.1
N$93: LED91.A R101.1
N$94: LED92.A R102.1
N$95: LED93.A R103.1
N$96: LED94.A R104.1
N$97: LED95.A R105.1
N$98: LED96.A R106.1
N$99: LED97.A R107.1
N$100: LED98.A R108.1
N$101: LED99.A R109.1
N$102: LED100.A R110.1
N$103: LED101.A R111.1
N$104: LED102.A R112.2
N$106: LED103.A R115.1
N$107: LED104.A R116.1
N$108: LED105.A R117.1
N$109: LED106.A R118.1
N$110: LED107.A R119.1
N$111: LED108.A R120.1
N$112: LED109.A R121.1
N$113: LED110.A R122.1
N$114: LED111.A R123.1
N$115: LED112.A R124.1
N$116: LED113.A R125.1
N$117: LED114.A R126.1
N$118: LED115.A R127.1
N$119: LED116.A R128.1
N$120: LED117.A R129.1
N$121: LED118.A R130.1
N$122: LED119.A R131.2
N$123: LED120.A R134.1
N$124: LED121.A R135.1
N$125: LED122.A R136.1
N$126: LED123.A R137.1
N$127: LED124.A R138.1
N$128: LED125.A R139.1
N$129: LED126.A R140.1
N$130: LED127.A R141.1
N$131: LED128.A R142.1
N$132: LED129.A R143.1
N$133: LED130.A R144.1
N$134: LED131.A R145.1
N$135: LED132.A R146.1
N$136: LED133.A R147.1
N$137: LED134.A R148.1
N$138: LED135.A R149.1
N$139: LED136.A R150.2
VIN: M1.J2.1 M2.J2.1 M3.J2.1 M4.J2.1 M5.J2.1 M6.J2.1 M7.J2.1 M8.J2.1

## Tracks (layer width: path | path; a pad name or v marks a point on that pad's centre or on a via)
2  (11 unrouted)
  Bottom 0.813: R1.2 M1.J1.5 | R39.2 M3.J1.5 | R77.2 M5.J1.5 | R115.2 M7.J1.5
3  (11 unrouted)
  Bottom 0.813: R2.2 M1.J1.6 | R40.2 M3.J1.6 | R78.2 M5.J1.6 | R116.2 M7.J1.6
3V3  (7 unrouted)
4  (11 unrouted)
  Bottom 0.813: R3.2 M1.J1.7 | R41.2 M3.J1.7 | R79.2 M5.J1.7 | R117.2 M7.J1.7
5  (11 unrouted)
  Bottom 0.813: R4.2 M1.J1.8 | R42.2 M3.J1.8 | R80.2 M5.J1.8 | R118.2 M7.J1.8
5V  (23 unrouted)
  Top 0.813: R19.1 32.16,54.74 29.37,57.54 18.19,57.54 16.16,59.57 6.54,59.57 1.51,64.59 1.51,69.81 2.19,70.49 JP1.1 | R57.1 32.16,144.91 29.37,147.71 18.19,147.71 16.16,149.74 6.54,149.74 1.51,154.76 1.51,159.98 2.19,160.66 JP3.1 | R95.1 184.56,141.1 181.77,143.9 170.59,143.9 168.56,145.93 158.94,145.93 153.91,150.95 153.91,156.17 154.59,156.85 JP5.1 | R133.1 184.56,52.2 181.77,55 170.59,55 168.56,57.03 158.94,57.03 153.91,62.05 153.91,67.27 154.59,67.95 JP7.1
  Bottom 0.813: R17.1 M1.J2.4 37.24,64.14 35.97,65.41 17.68,65.41 12.6,70.49 JP1.1 | R19.1 R18.1 | R55.1 M3.J2.4 37.24,154.31 35.97,155.58 17.68,155.58 12.6,160.66 JP3.1 | R57.1 R56.1 | R93.1 M5.J2.4 189.64,150.5 188.37,151.77 170.08,151.77 165,156.85 JP5.1 | R95.1 R94.1 | R131.1 M7.J2.4 189.64,61.6 188.37,62.87 170.08,62.87 165,67.95 JP7.1 | R133.1 R132.1
6  (11 unrouted)
  Bottom 0.813: R5.2 M1.J1.9 | R43.2 M3.J1.9 | R81.2 M5.J1.9 | R119.2 M7.J1.9
7  (11 unrouted)
  Bottom 0.813: R6.2 M1.J1.10 | R44.2 M3.J1.10 | R82.2 M5.J1.10 | R120.2 M7.J1.10
8  (11 unrouted)
  Bottom 0.813: R7.2 M1.J1.11 | R45.2 M3.J1.11 | R83.2 M5.J1.11 | R121.2 M7.J1.11
9  (11 unrouted)
  Bottom 0.813: R8.2 M1.J1.12 | R46.2 M3.J1.12 | R84.2 M5.J1.12 | R122.2 M7.J1.12
10  (11 unrouted)
  Bottom 0.813: R9.2 M1.J1.13 | R47.2 M3.J1.13 | R85.2 M5.J1.13 | R123.2 M7.J1.13
11  (11 unrouted)
  Bottom 0.813: R10.2 M1.J1.14 | R48.2 M3.J1.14 | R86.2 M5.J1.14 | R124.2 M7.J1.14
12  (11 unrouted)
  Bottom 0.813: R11.2 M1.J1.15 | R49.2 M3.J1.15 | R87.2 M5.J1.15 | R125.2 M7.J1.15
A0  (11 unrouted)
  Bottom 0.813: JP1.3 15.65,65.41 17.18,63.89 17.18,62.87 M1.J2.12 | JP3.3 15.65,155.58 17.18,154.06 17.18,153.04 M3.J2.12 | JP5.3 168.05,151.77 169.58,150.25 169.58,149.23 M5.J2.12 | JP7.3 168.05,62.87 169.58,61.35 169.58,60.33 M7.J2.12
A1  (11 unrouted)
  Bottom 0.813: M1.J2.11 R12.2 | M3.J2.11 R50.2 | M5.J2.11 R88.2 | M7.J2.11 R126.2
A2  (11 unrouted)
  Bottom 0.813: M1.J2.10 R13.2 | M3.J2.10 R51.2 | M5.J2.10 R89.2 | M7.J2.10 R127.2
A3  (11 unrouted)
  Bottom 0.813: M1.J2.9 R14.2 | M3.J2.9 R52.2 | M5.J2.9 R90.2 | M7.J2.9 R128.2
A4  (11 unrouted)
  Bottom 0.813: M1.J2.8 R15.2 | M3.J2.8 R53.2 | M5.J2.8 R91.2 | M7.J2.8 R129.2
A5  (11 unrouted)
  Bottom 0.813: M1.J2.7 R16.2 | M3.J2.7 R54.2 | M5.J2.7 R92.2 | M7.J2.7 R130.2
A6  (via drill 0.85 pad 0.6)  (15 unrouted)
  Top 0.508: 32.16,59.31 R19.2 | 32.16,149.48 R57.2 | 184.56,145.67 R95.2 | 184.56,56.77 R133.2
  Top 0.813: v59.6,55.78 33.42,55.78 32.16,57.03 32.16,59.31 | v59.6,145.95 33.42,145.95 32.16,147.2 32.16,149.48 | v212,142.14 185.82,142.14 184.56,143.39 184.56,145.67 | v212,53.24 185.82,53.24 184.56,54.49 184.56,56.77
  Bottom 0.508: 113.89,14.61 R38.2 | 113.89,104.78 R76.2 | 266.29,100.97 R114.2 | 266.29,12.07 R152.2
  Bottom 0.813: M1.J2.6 R19.2 | PH2.A 125.58,78.57 139.66,78.57 143.06,75.17 143.06,67.87 139.28,64.09 132.64,64.09 131.27,62.72 128.72,62.72 127.3,61.3 123.98,61.3 122.56,59.87 120.5,59.87 117.1,56.47 60.81,56.47 60.12,55.78 v59.6,55.78 | M3.J2.6 R57.2 | PH6.A 125.58,168.74 139.66,168.74 143.06,165.34 143.06,158.04 139.28,154.26 132.64,154.26 131.27,152.89 128.72,152.89 127.3,151.47 123.98,151.47 122.56,150.04 120.5,150.04 117.1,146.64 60.81,146.64 60.12,145.95 v59.6,145.95 | M5.J2.6 R95.2 | PH10.A 277.99,164.93 292.06,164.93 295.46,161.53 295.46,154.23 291.68,150.45 285.04,150.45 283.67,149.08 281.12,149.08 279.7,147.66 276.38,147.66 274.96,146.23 272.9,146.23 269.5,142.83 213.22,142.83 212.52,142.14 v212,142.14 | M7.J2.6 R133.2 | PH14.A 277.99,76.03 292.06,76.03 295.46,72.63 295.46,65.33 291.68,61.55 285.04,61.55 283.67,60.18 281.12,60.18 279.7,58.76 276.38,58.76 274.96,57.33 272.9,57.33 269.5,53.93 213.22,53.93 212.52,53.24 v212,53.24
A7  (via drill 0.85 pad 0.6)  (15 unrouted)
  Top 0.508: v59.53,57.66 35.09,57.66 34.7,58.04 R18.2 | v59.53,147.83 35.09,147.83 34.7,148.21 R56.2 | v211.93,144.02 187.49,144.02 187.1,144.4 R94.2 | v211.93,55.12 187.49,55.12 187.1,55.5 R132.2
  Bottom 0.508: 59.53,57.89 v59.53,57.66 | 59.53,148.06 v59.53,147.83 | 211.93,144.25 v211.93,144.02 | 211.93,55.35 v211.93,55.12
  Bottom 0.813: M1.J2.5 R18.2 | PH1.A 139.4,76.03 139.66,76.03 141.64,74.05 141.64,68.46 138.69,65.51 132.06,65.51 130.68,64.14 128.13,64.14 126.71,62.72 123.39,62.72 121.97,61.3 119.92,61.3 116.51,57.89 59.53,57.89 | M3.J2.5 R56.2 | PH5.A 139.4,166.2 139.66,166.2 141.64,164.22 141.64,158.63 138.69,155.68 132.06,155.68 130.68,154.31 128.13,154.31 126.71,152.89 123.39,152.89 121.97,151.47 119.92,151.47 116.51,148.06 59.53,148.06 | M5.J2.5 R94.2 | PH9.A 291.8,162.39 292.06,162.39 294.04,160.41 294.04,154.82 291.09,151.87 284.45,151.87 283.08,150.5 280.54,150.5 279.11,149.08 275.79,149.08 274.37,147.66 272.32,147.66 268.91,144.25 211.93,144.25 | M7.J2.5 R132.2 | PH13.A 291.8,73.49 292.06,73.49 294.04,71.51 294.04,65.92 291.09,62.97 284.45,62.97 283.08,61.6 280.54,61.6 279.11,60.18 275.79,60.18 274.37,58.76 272.32,58.76 268.91,55.35 211.93,55.35
GND  (via drill 0.35, 1 pad 2)  (87 unrouted)
  Top 0.508: v18.45,66.93 19.97,65.41 v39.53,65.41 | v18.45,157.1 19.97,155.58 v39.53,155.58 | v170.85,153.29 172.37,151.77 v191.93,151.77 | v170.85,64.39 172.37,62.87 v191.93,62.87
  Bottom 0.813: 42.32,63.89 M1.J2.2 v42.32,59.82 | 42.32,63.89 43.7,65.26 52.05,65.26 55.76,68.97 LED1.K LED2.K LED3.K LED4.K | 73.31,68.97 LED4.K | LED4.K LED5.K LED6.K 88.3,68.97 88.55,68.71 | LED7.K LED8.K LED9.K | LED9.K 98.97,68.97 | LED9.K LED10.K LED11.K 109.63,68.97 112.17,71.51 LED12.K LED13.K LED14.K | PH1.K LED17.K LED16.K LED15.K LED14.K | LED14.K 123.1,71.51 | PH2.K LED14.K | JP1.2 2.19,67.95 1.68,68.46 1.68,71.51 2.45,72.27 13.11,72.27 v18.45,66.93 | v39.53,65.41 40.8,65.41 42.32,63.89 | 42.32,154.06 M3.J2.2 v42.32,149.99 | 42.32,154.06 43.7,155.43 52.05,155.43 55.76,159.14 LED35.K LED36.K LED37.K LED38.K | 73.31,159.14 LED38.K | LED38.K LED39.K LED40.K 88.3,159.14 88.55,158.88 | LED41.K LED42.K LED43.K | LED43.K 98.97,159.14 | LED43.K LED44.K LED45.K 109.63,159.14 112.17,161.68 LED46.K LED47.K LED48.K | PH5.K LED51.K LED50.K LED49.K LED48.K | LED48.K 123.1,161.68 | PH6.K LED48.K | JP3.2 2.19,158.12 1.68,158.63 1.68,161.68 2.45,162.44 13.11,162.44 v18.45,157.1 | v39.53,155.58 40.8,155.58 42.32,154.06 | 194.72,150.25 M5.J2.2 v194.72,146.18 | 194.72,150.25 196.1,151.62 204.45,151.62 208.16,155.33 LED69.K LED70.K LED71.K LED72.K | 225.71,155.33 LED72.K | LED72.K LED73.K LED74.K 240.7,155.33 240.95,155.07 | LED75.K LED76.K LED77.K | LED77.K 251.37,155.33 | LED77.K LED78.K LED79.K 262.03,155.33 264.57,157.87 LED80.K LED81.K LED82.K | PH9.K LED85.K LED84.K LED83.K LED82.K | LED82.K 275.5,157.87 | PH10.K LED82.K | JP5.2 154.59,154.31 154.08,154.82 154.08,157.87 154.85,158.63 165.51,158.63 v170.85,153.29 | v191.93,151.77 193.2,151.77 194.72,150.25 | 194.72,61.35 M7.J2.2 v194.72,57.28 | 194.72,61.35 196.1,62.72 204.45,62.72 208.16,66.43 LED103.K LED104.K LED105.K LED106.K
  Bottom 0.813: 225.71,66.43 LED106.K | LED106.K LED107.K LED108.K 240.7,66.43 240.95,66.17 | LED109.K LED110.K LED111.K | LED111.K 251.37,66.43 | LED111.K LED112.K LED113.K 262.03,66.43 264.57,68.97 LED114.K LED115.K LED116.K | PH13.K LED119.K LED118.K LED117.K LED116.K | LED116.K 275.5,68.97 | PH14.K LED116.K | JP7.2 154.59,65.41 154.08,65.92 154.08,68.97 154.85,69.73 165.51,69.73 v170.85,64.39 | v191.93,62.87 193.2,62.87 194.72,61.35
  pour Bottom: 0,97.03 144.78,84.33 144.78,53.85 0,46.23
  pour Bottom: 0,187.2 144.78,174.5 144.78,144.02 0,136.4
  pour Bottom: 152.4,183.39 297.18,170.69 297.18,140.21 152.4,132.59
  pour Bottom: 152.4,94.49 297.18,81.79 297.18,51.31 152.4,43.69
GND.1  (7 unrouted)
N$1
  Bottom 0.813: LED1.A 56.85,72.22 52.68,72.22 47.9,67.44 R1.1
N$2
  Bottom 0.813: LED2.A 61.12,71.51 59.14,73.49 51.66,73.49 47.4,69.22 33.18,69.22 32.16,68.2 R2.1
N$3
  Bottom 0.813: R3.1 29.68,67.49 29.68,69.03 31.14,70.49 46.64,70.49 51.16,75.01 60.16,75.01 61.63,73.54 65.69,73.54 LED3.A
N$4
  Bottom 0.813: R4.1 27.14,67.49 27.14,70.55 28.25,71.66 45.8,71.66 50.57,76.43 61.02,76.43 62.49,74.96 67.83,74.96 71.29,71.51 LED4.A
N$5
  Bottom 0.813: LED5.A 76.11,73.28 74.07,73.28 70.97,76.38 63.35,76.38 61.88,77.86 49.98,77.86 44.91,72.78 25.81,72.78 24.54,71.51 R5.1
N$6
  Bottom 0.813: R6.1 48.67,81.41 50.71,79.38 62.64,79.38 64.22,77.81 71.58,77.81 74.58,74.81 77.63,74.81 80.93,71.51 LED6.A
N$7
  Bottom 0.813: LED7.A 86.01,71.51 83.98,73.54 81.19,73.54 78.39,76.33 75.09,76.33 72.19,79.23 65.08,79.23 63.41,80.9 51.21,80.9 49.28,82.83 31.76,82.83 30.64,83.95 R7.1
N$8
  Bottom 0.813: LED8.A 91.35,71.51 87.79,75.06 81.95,75.06 79.15,77.86 75.86,77.86 73.06,80.65 65.84,80.65 64.17,82.33 51.8,82.33 49.68,84.45 32.68,84.45 30.64,86.49 R8.1
N$9
  Bottom 0.813: LED9.A 95.93,71.51 93.94,73.49 91.65,73.49 88.65,76.48 82.54,76.48 79.74,79.28 76.45,79.28 73.65,82.08 66.68,82.08 65.01,83.75 52.39,83.75 50.27,85.87 49.69,85.87 | 49.69,85.87 33.55,85.87 30.39,89.03 R9.1 | 49.69,85.87 50.09,85.87 | 49.69,85.87
N$10
  Bottom 0.813: LED10.A 101.01,71.51 99.03,73.49 96.48,73.49 95.05,74.91 92.24,74.91 89.24,77.91 83.13,77.91 80.33,80.7 77.38,80.7 74.58,83.5 67.42,83.5 65.74,85.17 52.98,85.17 50.86,87.3 34.13,87.3 30.98,90.45 23.88,90.45 23.27,91.06 12.35,91.06 11.84,90.56 R10.1
N$11
  Bottom 0.813: R11.1 9.3,90.43 11.49,92.62 23.97,92.62 24.49,92.09 31.35,92.09 34.72,88.72 51.53,88.72 53.65,86.59 66.35,86.59 68.03,84.92 75.17,84.92 77.97,82.12 80.92,82.12 83.72,79.33 89.83,79.33 92.83,76.33 96.43,76.33 97.85,74.91 100.39,74.91 101.81,73.49 104.11,73.49 106.09,71.51 LED11.A
N$12
  Bottom 0.813: R12.1 19.46,56.77 20.24,57.55 46.36,57.55 55.23,66.43 112.17,66.43 113.44,67.7 LED12.A
N$13
  Bottom 0.813: R13.1 22,55.88 22.51,56.38 47.2,56.38 55.82,65 112.78,65 116.75,68.97 LED13.A
N$14
  Bottom 0.813: R14.1 24.54,54.23 25.52,55.22 48.05,55.22 56.41,63.58 114.16,63.58 117.63,67.06 117.7,66.98 119.34,66.98 121.33,68.97 LED14.A
N$15
  Bottom 0.813: LED15.A 126.4,68.97 125.58,68.15 124.42,66.98 121.62,66.98 120.2,65.56 118.15,65.56 114.74,62.16 57,62.16 48.75,53.91 28.28,53.91 27.08,52.71 R15.1
N$16
  Bottom 0.813: LED16.A 133.51,68.71 131.23,68.71 129.5,66.98 126.96,66.98 125.53,65.56 122.21,65.56 120.79,64.14 118.74,64.14 115.33,60.74 57.59,60.74 49.16,52.3 41.41,52.3 39.02,49.92 30.89,49.92 29.62,51.19 R16.1
N$17  (via drill 1 pad 2)
  other vias: 54.01,70.24
N$18  (1 unrouted)
N$19  (1 unrouted)
N$20  (via drill 0.35)
  Top 0.813: v42.42,50.84 41.91,50.84 40.8,51.95 v38.77,51.95
  Bottom 0.813: LED17.A 136.81,66.93 131.47,66.93 130.09,65.56 127.55,65.56 126.12,64.14 122.8,64.14 121.38,62.72 119.33,62.72 115.92,59.31 58.18,59.31 49.75,50.88 42.47,50.88 v42.42,50.84 | R17.2 v38.77,51.95
N$21  (1 unrouted)
N$22  (1 unrouted)
N$23  (1 unrouted)
N$24  (1 unrouted)
N$25  (1 unrouted)
N$26  (1 unrouted)
N$27  (1 unrouted)
N$28  (1 unrouted)
N$29  (1 unrouted)
N$30  (1 unrouted)
N$31  (1 unrouted)
N$32  (1 unrouted)
N$33  (1 unrouted)
N$34  (1 unrouted)
N$35  (1 unrouted)
N$36
  Bottom 0.813: LED35.A 56.85,162.39 52.68,162.39 47.9,157.61 R39.1
N$37
  Bottom 0.813: LED36.A 61.12,161.68 59.14,163.66 51.66,163.66 47.4,159.39 33.18,159.39 32.16,158.37 R40.1
N$38
  Bottom 0.813: R41.1 29.68,157.66 29.68,159.19 31.14,160.66 46.64,160.66 51.16,165.18 60.16,165.18 61.63,163.71 65.69,163.71 LED37.A
N$39
  Bottom 0.813: R42.1 27.14,157.66 27.14,160.72 28.25,161.83 45.8,161.83 50.57,166.6 61.02,166.6 62.49,165.13 67.83,165.13 71.29,161.68 LED38.A
N$40
  Bottom 0.813: LED39.A 76.11,163.45 74.07,163.45 70.97,166.55 63.35,166.55 61.88,168.03 49.98,168.03 44.91,162.95 25.81,162.95 24.54,161.68 R43.1
N$41
  Bottom 0.813: R44.1 48.67,171.58 50.71,169.55 62.64,169.55 64.22,167.97 71.58,167.97 74.58,164.98 77.63,164.98 80.93,161.68 LED40.A
N$42
  Bottom 0.813: LED41.A 86.01,161.68 83.98,163.71 81.19,163.71 78.39,166.5 75.09,166.5 72.19,169.4 65.08,169.4 63.41,171.07 51.21,171.07 49.28,173 31.76,173 30.64,174.12 R45.1
N$43
  Bottom 0.813: LED42.A 91.35,161.68 87.79,165.23 81.95,165.23 79.15,168.03 75.86,168.03 73.06,170.82 65.84,170.82 64.17,172.5 51.8,172.5 49.68,174.62 32.68,174.62 30.64,176.66 R46.1
N$44
  Bottom 0.813: LED43.A 95.93,161.68 93.94,163.66 91.65,163.66 88.65,166.65 82.54,166.65 79.74,169.45 76.45,169.45 73.65,172.25 66.68,172.25 65.01,173.92 52.39,173.92 50.27,176.04 49.69,176.04 | 49.69,176.04 33.55,176.04 30.39,179.2 R47.1 | 49.69,176.04 50.09,176.04 | 49.69,176.04
N$45
  Bottom 0.813: LED44.A 101.01,161.68 99.03,163.66 96.48,163.66 95.05,165.08 92.24,165.08 89.24,168.08 83.13,168.08 80.33,170.87 77.38,170.87 74.58,173.67 67.42,173.67 65.74,175.34 52.98,175.34 50.86,177.47 34.13,177.47 30.98,180.62 23.88,180.62 23.27,181.23 12.35,181.23 11.84,180.73 R48.1
N$46
  Bottom 0.813: R49.1 9.3,180.6 11.49,182.79 23.97,182.79 24.49,182.27 31.35,182.27 34.72,178.89 51.53,178.89 53.65,176.76 66.35,176.76 68.03,175.09 75.17,175.09 77.97,172.29 80.92,172.29 83.72,169.5 89.83,169.5 92.83,166.5 96.43,166.5 97.85,165.08 100.39,165.08 101.81,163.66 104.11,163.66 106.09,161.68 LED45.A
N$47
  Bottom 0.813: R50.1 19.46,146.94 20.24,147.72 46.36,147.72 55.23,156.6 112.17,156.6 113.44,157.87 LED46.A
N$48
  Bottom 0.813: R51.1 22,146.05 22.51,146.55 47.2,146.55 55.82,155.17 112.78,155.17 116.75,159.14 LED47.A
N$49
  Bottom 0.813: R52.1 24.54,144.4 25.52,145.38 48.05,145.38 56.41,153.75 114.16,153.75 117.63,157.23 117.7,157.16 119.34,157.16 121.33,159.14 LED48.A
N$50
  Bottom 0.813: LED49.A 126.4,159.14 125.58,158.32 125.58,158.31 124.42,157.16 121.62,157.16 120.2,155.73 118.15,155.73 114.74,152.33 57,152.33 48.75,144.08 28.28,144.08 27.08,142.88 R53.1
N$51
  Bottom 0.813: LED50.A 133.51,158.88 131.23,158.88 129.5,157.16 126.96,157.16 125.53,155.73 122.21,155.73 120.79,154.31 118.74,154.31 115.33,150.91 57.59,150.91 49.16,142.47 41.41,142.47 39.02,140.09 30.89,140.09 29.62,141.36 R54.1
N$52  (via drill 0.35)
  Top 0.813: v42.42,141 41.91,141 40.8,142.12 v38.77,142.12
  Bottom 0.813: LED51.A 136.81,157.1 131.47,157.1 130.09,155.73 127.55,155.73 126.12,154.31 122.8,154.31 121.38,152.89 119.33,152.89 115.92,149.48 58.18,149.48 49.75,141.05 42.47,141.05 v42.42,141 | R55.2 v38.77,142.12
N$53  (1 unrouted)
N$54  (1 unrouted)
N$55  (1 unrouted)
N$56  (1 unrouted)
N$57  (1 unrouted)
N$58  (1 unrouted)
N$59  (1 unrouted)
N$60  (1 unrouted)
N$61  (1 unrouted)
N$62  (1 unrouted)
N$63  (1 unrouted)
N$64  (1 unrouted)
N$65  (1 unrouted)
N$66  (1 unrouted)
N$67  (1 unrouted)
N$68  (1 unrouted)
N$69  (1 unrouted)
N$70  (via drill 1 pad 2)
  other vias: 54.01,160.41
N$71
  Bottom 0.813: LED69.A 209.25,158.58 205.08,158.58 200.3,153.8 R77.1
N$72
  Bottom 0.813: LED70.A 213.52,157.87 211.54,159.85 204.06,159.85 199.8,155.58 185.58,155.58 184.56,154.56 R78.1
N$73
  Bottom 0.813: R79.1 182.07,153.85 182.07,155.38 183.54,156.85 199.04,156.85 203.56,161.37 212.56,161.37 214.03,159.9 218.09,159.9 LED71.A
N$74
  Bottom 0.813: R80.1 179.53,153.85 179.53,156.91 180.65,158.02 198.2,158.02 202.97,162.79 213.42,162.79 214.89,161.32 220.23,161.32 223.69,157.87 LED72.A
N$75
  Bottom 0.813: LED73.A 228.51,159.64 226.47,159.64 223.38,162.74 215.75,162.74 214.28,164.22 202.38,164.22 197.31,159.14 178.21,159.14 176.94,157.87 R81.1
N$76
  Bottom 0.813: R82.1 201.07,167.77 203.11,165.74 215.04,165.74 216.62,164.16 223.99,164.16 226.98,161.17 230.03,161.17 233.33,157.87 LED74.A
N$77
  Bottom 0.813: LED75.A 238.41,157.87 236.38,159.9 233.59,159.9 230.79,162.69 227.49,162.69 224.59,165.59 217.48,165.59 215.81,167.26 203.61,167.26 201.68,169.19 184.16,169.19 183.04,170.31 R83.1
N$78
  Bottom 0.813: LED76.A 243.75,157.87 240.19,161.42 234.35,161.42 231.55,164.22 228.26,164.22 225.46,167.01 218.24,167.01 216.57,168.69 204.2,168.69 202.08,170.81 185.08,170.81 183.04,172.85 R84.1
N$79
  Bottom 0.813: LED77.A 248.33,157.87 246.34,159.85 244.05,159.85 241.05,162.84 234.94,162.84 232.14,165.64 228.85,165.64 226.05,168.44 219.08,168.44 217.41,170.11 204.79,170.11 202.67,172.23 202.09,172.23 | 202.09,172.23 185.95,172.23 182.79,175.39 R85.1 | 202.09,172.23 202.49,172.23 | 202.09,172.23
N$80
  Bottom 0.813: LED78.A 253.41,157.87 251.43,159.85 248.88,159.85 247.45,161.27 244.64,161.27 241.64,164.27 235.53,164.27 232.73,167.06 229.78,167.06 226.98,169.86 219.81,169.86 218.14,171.53 205.38,171.53 203.26,173.66 186.53,173.66 183.38,176.81 176.28,176.81 175.67,177.42 164.75,177.42 164.24,176.92 R86.1
N$81
  Bottom 0.813: R87.1 161.7,176.79 163.89,178.98 176.37,178.98 176.89,178.46 183.75,178.46 187.12,175.08 203.93,175.08 206.05,172.95 218.75,172.95 220.43,171.28 227.57,171.28 230.37,168.48 233.32,168.48 236.12,165.69 242.23,165.69 245.23,162.69 248.83,162.69 250.25,161.27 252.79,161.27 254.21,159.85 256.5,159.85 258.49,157.87 LED79.A
N$82
  Bottom 0.813: R88.1 171.86,143.13 172.64,143.91 198.76,143.91 207.63,152.79 264.57,152.79 265.84,154.06 LED80.A
N$83
  Bottom 0.813: R89.1 174.4,142.24 174.91,142.74 199.6,142.74 208.22,151.36 265.18,151.36 269.15,155.33 LED81.A
N$84
  Bottom 0.813: R90.1 176.94,140.59 177.93,141.57 200.45,141.57 208.81,149.94 266.56,149.94 270.03,153.42 270.1,153.34 271.75,153.34 273.73,155.33 LED82.A
N$85
  Bottom 0.813: LED83.A 278.8,155.33 277.99,154.51 277.99,154.5 276.82,153.34 274.02,153.34 272.6,151.92 270.55,151.92 267.14,148.52 209.4,148.52 201.15,140.27 180.68,140.27 179.48,139.07 R91.1
N$86
  Bottom 0.813: LED84.A 285.91,155.07 283.63,155.07 281.9,153.34 279.36,153.34 277.93,151.92 274.61,151.92 273.19,150.5 271.14,150.5 267.73,147.1 209.99,147.1 201.56,138.66 193.81,138.66 191.42,136.28 183.29,136.28 182.02,137.55 R92.1
N$87  (via drill 0.35)
  Top 0.813: v194.82,137.19 194.31,137.19 193.2,138.31 v191.17,138.31
  Bottom 0.813: LED85.A 289.21,153.29 283.87,153.29 282.49,151.92 279.95,151.92 278.52,150.5 275.2,150.5 273.78,149.08 271.73,149.08 268.32,145.67 210.58,145.67 202.15,137.24 194.87,137.24 v194.82,137.19 | R93.2 v191.17,138.31
N$88  (1 unrouted)
N$89  (1 unrouted)
N$90  (1 unrouted)
N$91  (1 unrouted)
N$92  (1 unrouted)
N$93  (1 unrouted)
N$94  (1 unrouted)
N$95  (1 unrouted)
N$96  (1 unrouted)
N$97  (1 unrouted)
N$98  (1 unrouted)
N$99  (1 unrouted)
N$100  (1 unrouted)
N$101  (1 unrouted)
N$102  (1 unrouted)
N$103  (1 unrouted)
N$104  (1 unrouted)
N$105  (via drill 1 pad 2)
  other vias: 206.41,156.6
N$106
  Bottom 0.813: LED103.A 209.25,69.68 205.08,69.68 200.3,64.9 R115.1
N$107
  Bottom 0.813: LED104.A 213.52,68.97 211.54,70.95 204.06,70.95 199.8,66.68 185.58,66.68 184.56,65.66 R116.1
N$108
  Bottom 0.813: R117.1 182.07,64.95 182.07,66.48 183.54,67.95 199.04,67.95 203.56,72.47 212.56,72.47 214.03,71 218.09,71 LED105.A
N$109
  Bottom 0.813: R118.1 179.53,64.95 179.53,68.01 180.65,69.12 198.2,69.12 202.97,73.89 213.42,73.89 214.89,72.42 220.23,72.42 223.69,68.97 LED106.A
N$110
  Bottom 0.813: LED107.A 228.51,70.74 226.47,70.74 223.38,73.84 215.75,73.84 214.28,75.32 202.38,75.32 197.31,70.24 178.21,70.24 176.94,68.97 R119.1
N$111
  Bottom 0.813: R120.1 201.07,78.87 203.11,76.84 215.04,76.84 216.62,75.27 223.99,75.27 226.98,72.27 230.03,72.27 233.33,68.97 LED108.A
N$112
  Bottom 0.813: LED109.A 238.41,68.97 236.38,71 233.59,71 230.79,73.79 227.49,73.79 224.59,76.69 217.48,76.69 215.81,78.36 203.61,78.36 201.68,80.29 184.16,80.29 183.04,81.41 R121.1
N$113
  Bottom 0.813: LED110.A 243.75,68.97 240.19,72.52 234.35,72.52 231.55,75.32 228.26,75.32 225.46,78.11 218.24,78.11 216.57,79.79 204.2,79.79 202.08,81.91 185.08,81.91 183.04,83.95 R122.1
N$114
  Bottom 0.813: LED111.A 248.33,68.97 246.34,70.95 244.05,70.95 241.05,73.94 234.94,73.94 232.14,76.74 228.85,76.74 226.05,79.54 219.08,79.54 217.41,81.21 204.79,81.21 202.67,83.33 202.09,83.33 | 202.09,83.33 185.95,83.33 182.79,86.49 R123.1 | 202.09,83.33 202.49,83.33 | 202.09,83.33
N$115
  Bottom 0.813: LED112.A 253.41,68.97 251.43,70.95 248.88,70.95 247.45,72.37 244.64,72.37 241.64,75.37 235.53,75.37 232.73,78.16 229.78,78.16 226.98,80.96 219.81,80.96 218.14,82.63 205.38,82.63 203.26,84.75 186.53,84.75 183.38,87.91 176.28,87.91 175.67,88.52 164.75,88.52 164.24,88.02 R124.1
N$116
  Bottom 0.813: R125.1 161.7,87.89 163.89,90.08 176.37,90.08 176.89,89.56 183.75,89.56 187.12,86.18 203.93,86.18 206.05,84.05 218.75,84.05 220.43,82.38 227.57,82.38 230.37,79.58 233.32,79.58 236.12,76.79 242.23,76.79 245.23,73.79 248.83,73.79 250.25,72.37 252.79,72.37 254.21,70.95 256.5,70.95 258.49,68.97 LED113.A
N$117
  Bottom 0.813: R126.1 171.86,54.23 172.64,55.01 198.76,55.01 207.63,63.89 264.57,63.89 265.84,65.16 LED114.A
N$118
  Bottom 0.813: R127.1 174.4,53.34 174.91,53.84 199.6,53.84 208.22,62.46 265.18,62.46 269.15,66.43 LED115.A
N$119
  Bottom 0.813: R128.1 176.94,51.69 177.93,52.68 200.45,52.68 208.81,61.04 266.56,61.04 270.03,64.52 270.1,64.44 271.75,64.44 273.73,66.43 LED116.A
N$120
  Bottom 0.813: LED117.A 278.8,66.43 277.99,65.61 276.82,64.44 274.02,64.44 272.6,63.02 270.55,63.02 267.14,59.62 209.4,59.62 201.15,51.37 180.68,51.37 179.48,50.17 R129.1
N$121
  Bottom 0.813: LED118.A 285.91,66.17 283.63,66.17 281.9,64.44 279.36,64.44 277.93,63.02 274.61,63.02 273.19,61.6 271.14,61.6 267.73,58.2 209.99,58.2 201.56,49.76 193.81,49.76 191.42,47.38 183.29,47.38 182.02,48.65 R130.1
N$122  (via drill 0.35)
  Top 0.813: v194.82,48.3 194.31,48.3 193.2,49.41 v191.17,49.41
  Bottom 0.813: LED119.A 289.21,64.39 283.87,64.39 282.49,63.02 279.95,63.02 278.52,61.6 275.2,61.6 273.78,60.18 271.73,60.18 268.32,56.77 210.58,56.77 202.15,48.34 194.87,48.34 v194.82,48.3 | R131.2 v191.17,49.41
N$123  (1 unrouted)
N$124  (1 unrouted)
N$125  (1 unrouted)
N$126  (1 unrouted)
N$127  (1 unrouted)
N$128  (1 unrouted)
N$129  (1 unrouted)
N$130  (1 unrouted)
N$131  (1 unrouted)
N$132  (1 unrouted)
N$133  (1 unrouted)
N$134  (1 unrouted)
N$135  (1 unrouted)
N$136  (1 unrouted)
N$137  (1 unrouted)
N$138  (1 unrouted)
N$139  (1 unrouted)
N$140  (via drill 1 pad 2)
  other vias: 206.41,67.7
VIN  (via drill 1 pad 2)  (7 unrouted)
  Bottom 0.813: M1.J2.1 v44.86,59.82 | M3.J2.1 v44.86,149.99 | M5.J2.1 v197.26,146.18 | M7.J2.1 v197.26,57.28

## Text on the board
Bottom: Andreas Pratama Putra | 10511910000033 | Andreas Pratama Putra | 10511910000033 | Andreas Pratama Putra | 10511910000033 | Andreas Pratama Putra | 10511910000033
Dimension: Andreas Pratama Putra | 10511910000033 | Andreas Pratama Putra | 10511910000033 | Propeller Clock | Propeller Clock | Andreas Pratama Putra | Andreas Pratama Putra | 10511910000033 | 10511910000033 | Propeller Clock | Propeller Clock